# Altium PCB salinity.PcbDoc
Units mil, origin at the board's own origin, x right, y up, seen from the top; angles counter-clockwise.
Board outline 535 x 1270 mil, 4 copper layers (Top Layer, Internal Plane 1, Internal Plane 2, Bottom Layer), stack 30.634 mil thick; 20 components, 17 nets, 91 pads, 16 vias.
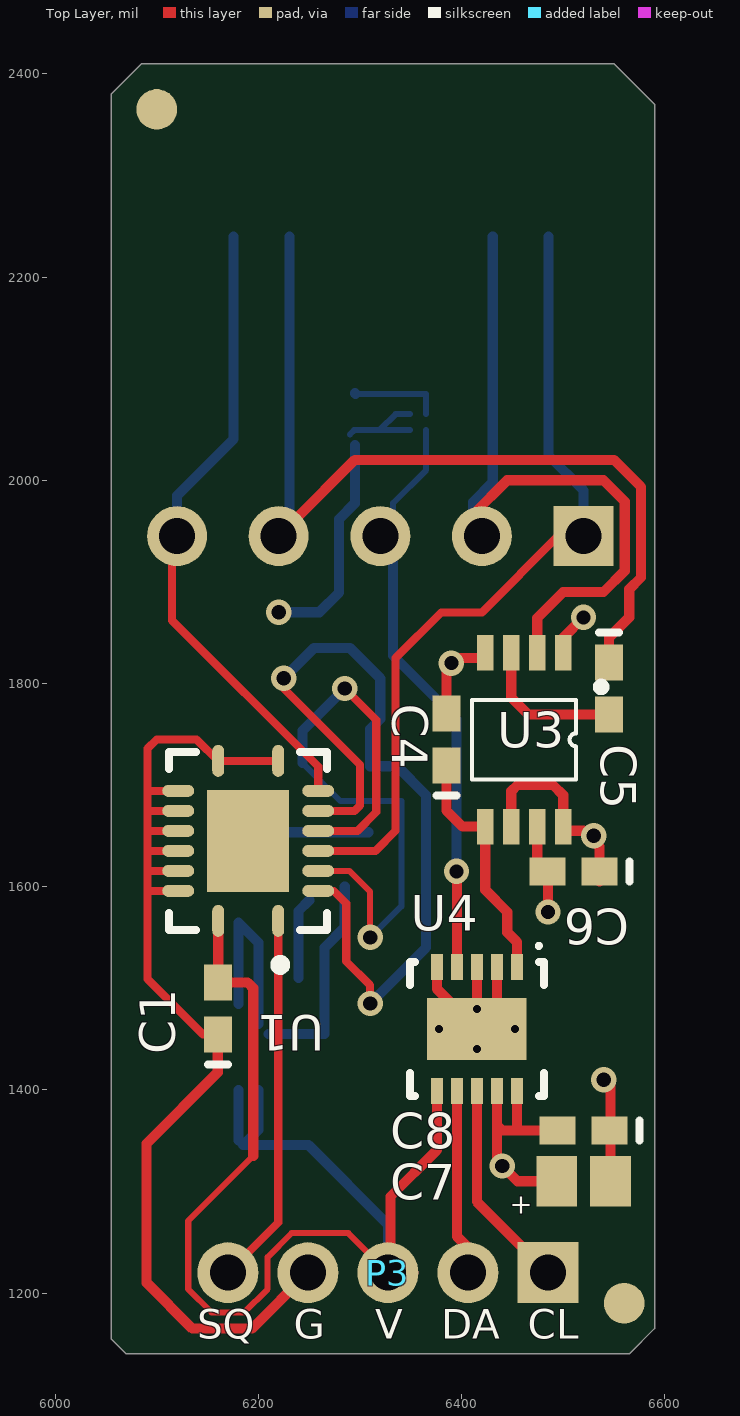
[diagram p0: Top Layer view]
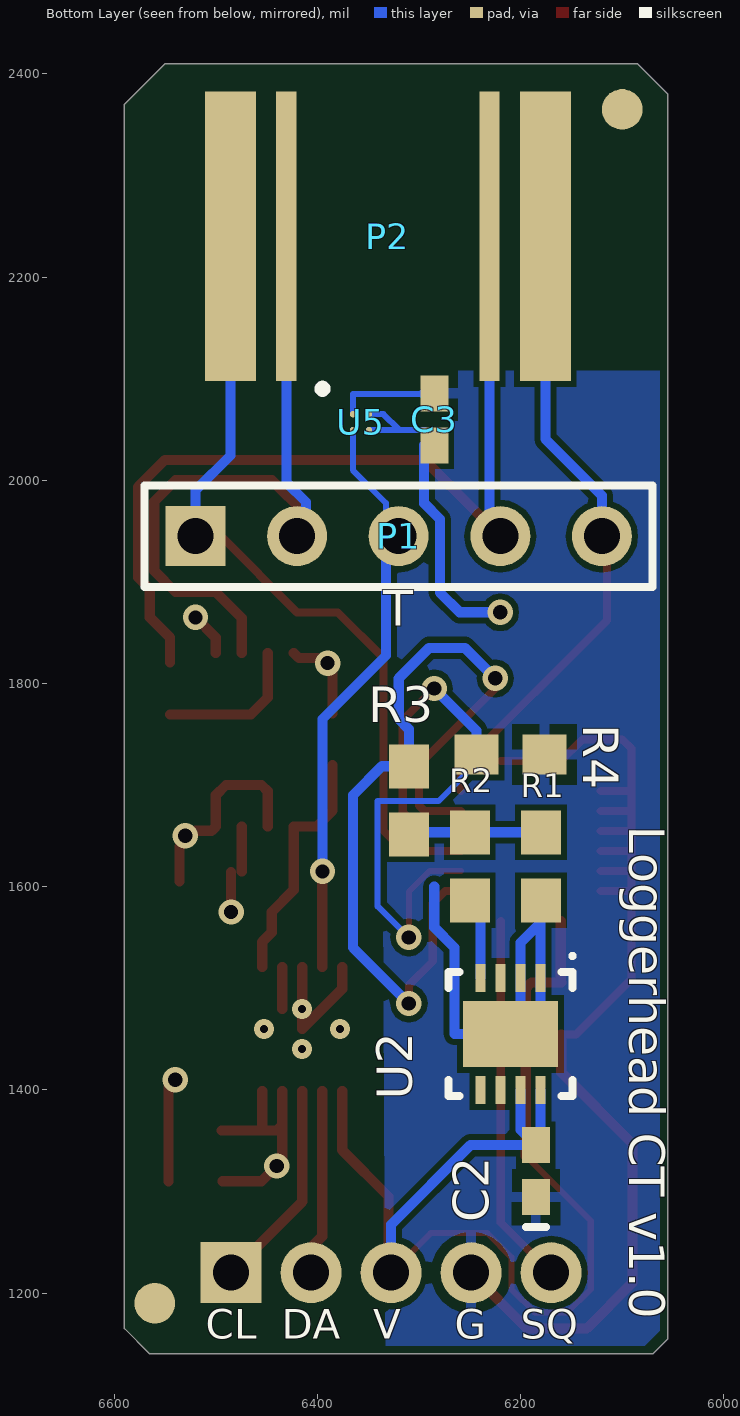
[diagram p1: Bottom Layer view, seen from below]
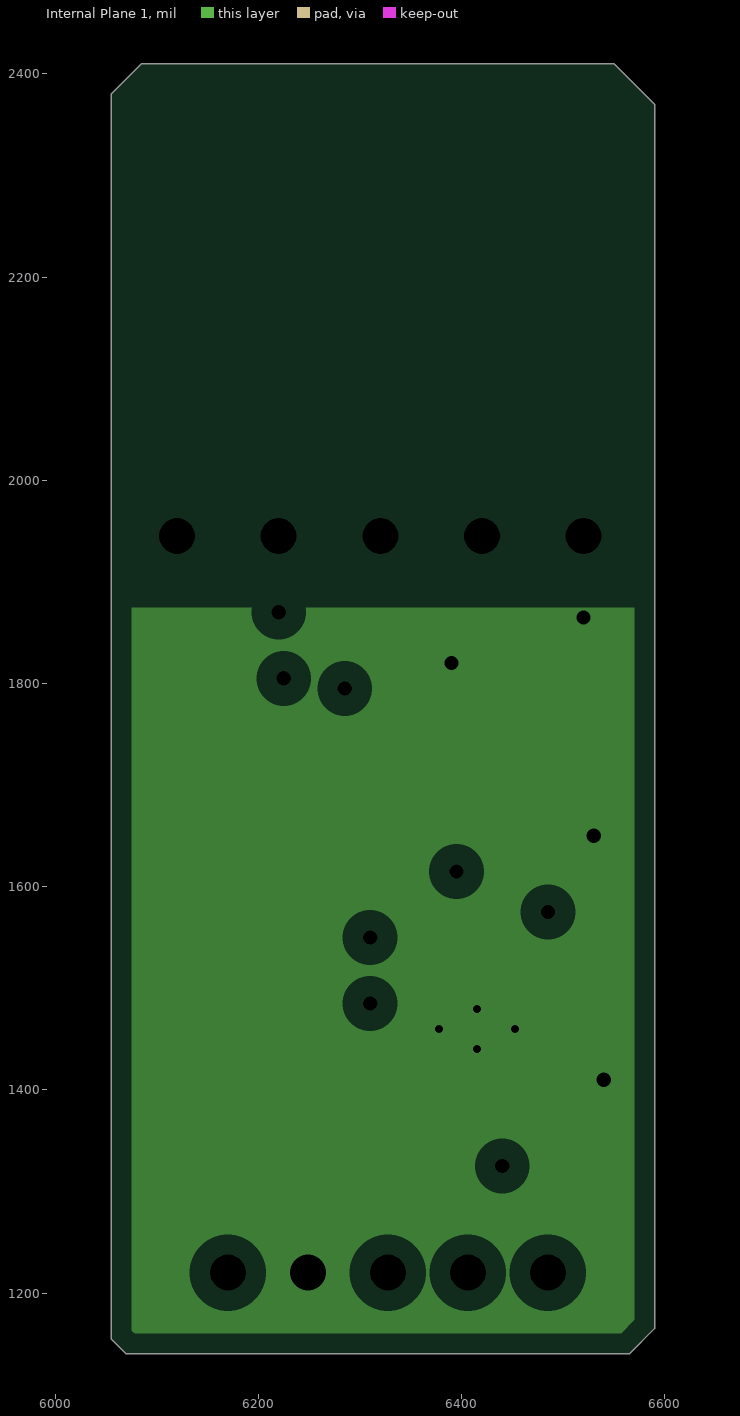
[diagram p2: Internal Plane 1, clearances drawn from the general rule]
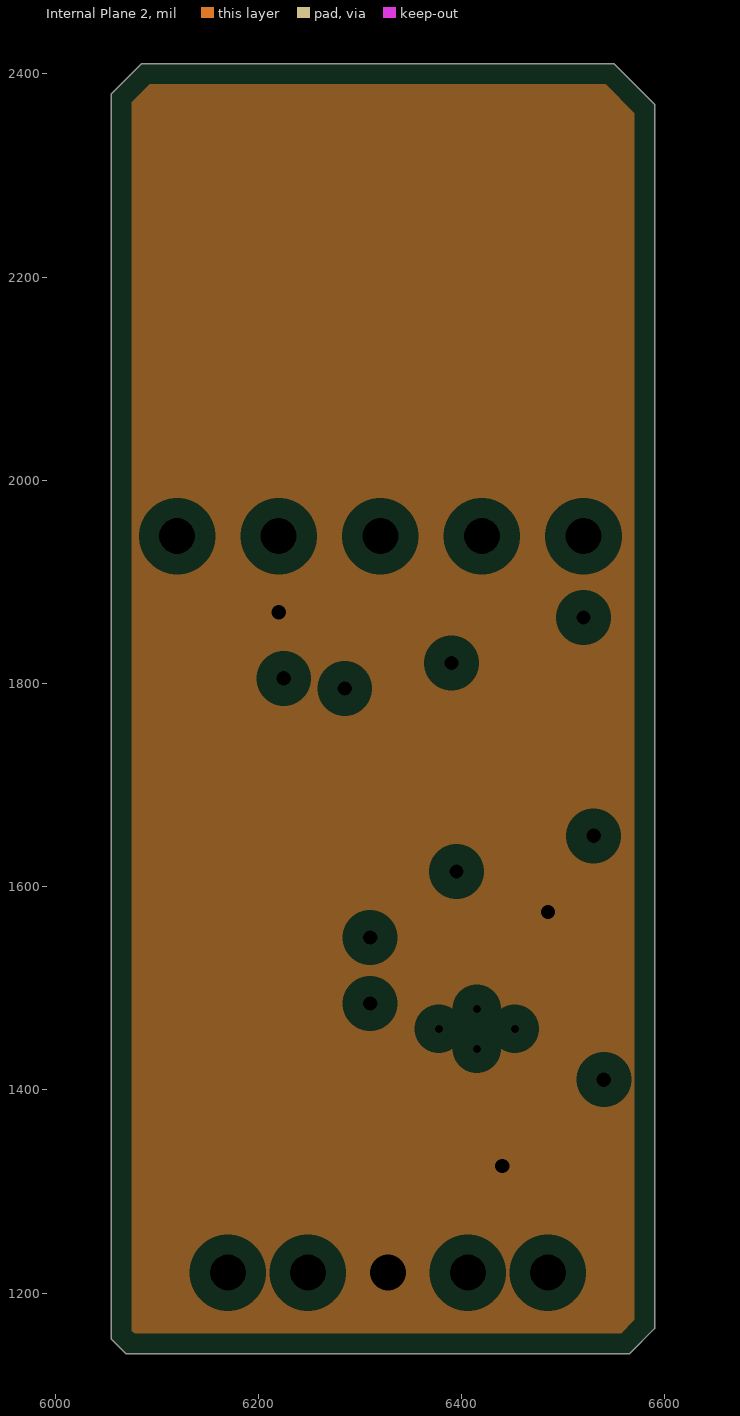
[diagram p3: Internal Plane 2, clearances drawn from the general rule]

## Layer stack, top to bottom
Top Solder: solder mask 0.4, Solder Resist, Dk 3.5
Top Layer: signal copper 1.4
Dielectric 1: core 10, FR-4, Dk 4.2
Internal Plane 1: plane copper 1.417, net GND
Dielectric 3: prepreg 5, Dk 4.2
Internal Plane 2: plane copper 1.417, net VCC
Dielectric 2: core 10, Dk 4.2
Bottom Layer: signal copper 1.4
Bottom Solder: solder mask 0.4, Solder Resist, Dk 3.5

## Board outline
6055,1155 6070,1140 6565,1140 6590,1165 6590,2370 6550,2410 6085,2410 6055,2380

## Design rules (kind name [scope] priority, off if disabled: settings)
Clearance [All] p1: gap=6
PlaneClearance [All] p1: clearance=20
PlaneConnect [All] p1: planeconnectstyle=Relief reliefexpansion=20 reliefentries=4 reliefconductorwidth=10 reliefairgap=10
PolygonConnect [All] p1: connectstyle=Relief reliefconductorwidth=10 reliefentries=4 polygonreliefangle="90 Angle" airgapwidth=10
RoutingVias [All] p1: holewidth=14 width=25 viastyle="Through Hole" minholewidth=10 minwidth=20 maxholewidth=28 maxwidth=50
SolderMaskExpansion [All] p1: expansion=4
Width [All] p1: maxlimit=50 minlimit=6 preferedwidth=8
27 further rules are at their usual default settings.

## Components (designator, comment, footprint, x,y, rotation, side; value= is the part's Value field where it differs from the comment)
C1 "0.1uF" 0402 6160,1480 r90 top
C2 "0.1uF" 0402 6185,1320 r90 bottom
C3 "0.1uF" 0402 6285,2060 r270 bottom
C4 "1.0uF" 0402 6385,1745 r90 top
C5 "0.1uF" 0402 6545,1795 r270 top
C6 "10nF" 0402 6510,1615 r180 top
C7 "10uF" Tant0805 6520,1310 r180 top
C8 "0.1uF" 0402 6520,1360 r180 top
P1 "Header 5" HDR1X5 6520,1945 r180 bottom
P2 "Salinity" SALINITY 6485.59,2240 r180 bottom
P3 "HDR_5x1_2mm" Hdr_5x1_2mm 6170,1220 r90 top
R1 "500x" 3-0603 6180,1620 r90 bottom
R2 "25k" 3-0603 6250,1620 r270 bottom
R3 "25X" 3-0603 6310,1685 r90 bottom
R4 "600X" 3-0603 6210,1730 r180 bottom
U1 "ts3a5018" ts3a5018_VQFN 6190,1645 r90 top
U2 "LT3092EDD#PBF" LT-DD-8_V 6210,1455 r270 bottom
U3 "LTC1966" MSOP8-LTC1966 6500,1830 r270 top
U4 "MCP3423-E/MF" DFN-MF10 6415,1460 r270 top
U5 "Temp" BGA4_TMP103 6365,2065 r180 bottom

## Footprints (in the part's own frame and the unit in brackets; to place one, negate y for a bottom-side part, rotate by r counter-clockwise, add the part's x,y. Pads: shape width x height; smd on the part's side, far side on the other; paste and mask are expansions set on the pad)
3-0603 [mm] "Chip Resistor; Body 1.6 x 0.9 mm (LxW typ)"
  rect 1.1x1 smd: 1(-0.85,0) 2(0.85,0)
0402 [mm] "Chip Capacitor; Body 1.0 x 0.5 mm (LxW typ)"
  rect 0.9x0.7 smd: 1(-0.65,0) 2(0.65,0)
  silkscreen extent -1.4,-0.25 -1.4,0.25
BGA4_TMP103 [mm] "BGA, 4-Leads, Body 0.8x0.8mm,  Pitch 0.40mm"
  round 0.16 smd: A1(0,0) A2(0.4,0) B1(0,-0.4) B2(0.4,-0.4)
  silkscreen extent -0.84,0.56 -0.69,0.71, body extent -0.18,-0.58 0.58,0.18, height 0.63
DFN-MF10 [mm] "SON, 10-Leads, Body 3x3mm, Pitch 0.5mm, Microchip Recommended"
  rect 0.65x0.3 smd: 1(-1.55,1) 2(-1.55,0.5) 3(-1.55,0) 4(-1.55,-0.5) 5(-1.55,-1) 6(1.55,-1) 7(1.55,-0.5) 8(1.55,0) 9(1.55,0.5) 10(1.55,1)
  rect 1.55x2.48 smd paste-0.635: 11(0,0)
  silkscreen extent -2.12,-1.68 1.67,1.68, body extent -1.52,-1.52 1.52,1.52, height 1
HDR1X5 [mm] "Connector; Header; 5 Position"
  rect 1.5x1.5 hole 0.9: 1(0,0)
  round 1.5 hole 0.9: 2(2.54,0) 3(5.08,0) 4(7.62,0) 5(10.16,0)
  silkscreen extent -1.27,-1.27 11.43,1.27
Hdr_5x1_2mm [mil]
  rect 60x60 hole 35.43: 1(0,-314.96)
  round 60 hole 35.43: 2(0,-236.22) 3(0,-157.48) 4(0,-78.74) 5(0,0)
LT-DD-8_V [mm] "SON, 8-Leads, Body 3x3mm, Pitch 0.5mm, Thermal Pad 1.65x2.38 mm, IPC Low Density"
  rect 0.7x0.25 smd mask+0.102: 1(-1.4,0.75) 2(-1.4,0.25) 3(-1.4,-0.25) 4(-1.4,-0.75) 5(1.4,-0.75) 6(1.4,-0.25) 7(1.4,0.25) 8(1.4,0.75)
  rect 1.65x2.38 smd paste-0.635 mask+0.102: 9(0,0)
  silkscreen extent -2,-1.55 1.55,1.6, body extent -1.5,-1.5 1.5,1.5, height 0.8
MSOP8-LTC1966 [mm]
  rect 0.889x0.42 smd: 1(0,0) 2(0,-0.65) 3(0,-1.3) 4(0,-1.95) 5(4.341,-1.95) 6(4.341,-1.3) 7(4.341,-0.65) 8(4.341,0)
  silkscreen extent 0.77,-2.28 3.16,1.03
SALINITY [mil]
  rect 50x285 smd paste+0 mask+0: 1(0,0) 4(310,0)
  rect 20x285 smd paste+0 mask+0: 2(55,0) 3(255,0)
Tant0805 [mil]
  rect 40x50 smd: 1(-26.5,0) 2(26.5,0)
ts3a5018_VQFN [mm] "quad SPDT analog switch"
  oval 0.8x0.3 smd: 1(-2,-0.75) 8(2,-0.75) 9(2,0.75) 16(-2,0.75)
  oval 0.3x0.8 smd: 2(-1.25,-1.75) 3(-0.75,-1.75) 4(-0.25,-1.75) 5(0.25,-1.75) 6(0.75,-1.75) 7(1.25,-1.75) 10(1.25,1.75) 11(0.75,1.75) 12(0.25,1.75) 13(-0.25,1.75) 14(-0.75,1.75) 15(-1.25,1.75)
  rect 2.55x2.05 smd paste-0.635: 17(0,0)
  silkscreen extent -3.22,-1.97 2.22,1.97, body extent -2.08,-1.83 2.07,1.83, height 1

## Part data
C1 C2 C3 C4 C5 C6 C8: library part C0402, "Ceramic Chip Capacitor - Standard"
C7: library part Tant0805
P1: "Header, 5-Pin"
P2: library part SALINITY
R1 R2 R3 R4: library part ERJ3BQ, "Low Ohmic Value Thick Film Chip Resistor, 0.22 Ohm to 9.1 Ohm Range, 1%, 2% and 5% Tolerance, 0603 Size, 0.2 W"
U1: "Quad SPDT"
U2: "200 mA Two-Terminal Programmable Current Source, 0.3 mA Isupply, 8-pin SON (DD-8), -40 to 125 degC, Pb-Free"
U4: "18-Bit, 4-Channel Analog-to-Digital Converter with I2C Interface and On-Board Reference, 10-pin DFN, Extended Temperature"
U5: library part LMT70

## Free pads (board coordinates)
  round 40 smd paste-20 mask+5: 0(6100,2365) 0(6560,1190)
  round 40 smd far side paste-20 mask+5: 0(6100,2365) 0(6560,1190)

## Via types
v1: diameter 25, hole 14, Top Layer to Bottom Layer, 12 vias
v2: diameter 19.68, hole 7.87, Top Layer to Bottom Layer, tented top, 4 vias

## Nets (pads, with @x,y where several pads share a name; then routed paths per layer and width w, separated by ;. In a path a pad name is that pad's centre, name@x,y a point inside that pad or via, vN(x,y) a via of type N, cw(c..) or ccw(c..) an arc to the next point about the centre after c; other vN are vias at no path point)
CURRENTSOURCE: R3.2 U1.2 U1.6 | length 845.5
  Top Layer w8: v1(6225,1805) 6225,1795 6300,1720 6300,1680 6294.53,1674.53 U1.6 ; U1.2 6274.21,1595.79 6286.5,1583.5 6286.5,1526.5 6310,1503 v1(6310,1485)
  Bottom Layer w10: v1(6225,1805) 6255,1835 6290,1835 6320,1805 6320,1765 6310,1755 R3.2 6336.54,1718.46 6365,1690 6365,1540 v1(6310,1485)
DRIVE1: P1.1 P2.1 U1.4 | length 798.3
  Top Layer w8: U1.4 6315.16,1635.16 6335,1655 6335,1825 6380,1870 6419.96,1870 6494.96,1945 P1.1
  Bottom Layer w10: P2.1 6485.59,2024.41 6520,1990 P1.1
DRIVE2: P1.5 P2.4 U1.7 | length 623.4
  Top Layer w8: P1.5@6115,1940 6115,1862.02 6258.9,1718.12 U1.7
  Bottom Layer w10: P1.5 6120,1985 6175.59,2040.59 P2.4
DRIVEGND: R4.1 U1.3 U1.5 | length 654.1
  Top Layer w6: U1.3 6289.53,1615.47 6310,1595 v1(6310,1550)
  Top Layer w8: U1.5 6297.47,1654.84 6316,1673.37 6316,1764 v1(6285,1795)
  Bottom Layer w6: R4.1@6243.46,1721.54 6280.81,1684.19 6340.69,1684.19 6340.69,1580.69 v1(6310,1550)
  Bottom Layer w10: R4.1@6243.46,1721.54 R4.1 6243.46,1753.46 v1(6285,1795)
GND: C1.1 C2.1 C3.1 C4.2 C6.1 C7.1 C8.1 P3.4 R4.2 U1.8 U1.9 U1.10 U1.11 U1.12 U1.13 U1.14 U1.15 U3.1 U3.4 U3.6 U3.8 U4.2 U4.3 U4.5 U4.11 U5.A1 | length 1827.6
  Top Layer w8: U1.15 6090.79,1595.79 ; U1.14 6090.79,1615.47 ; U1.13 6090.79,1635.16 ; U1.12 6090.79,1654.84 ; U1.11 6090.79,1674.53 ; U1.10 6090.79,1694.21 ; C1.1 6145.59,1454.41 6090.79,1509.21 6090.79,1595.79 ; U1.8 U1.9 6139.21,1745 6100,1745 6090.79,1735.79 6090.79,1694.21 ; 6090.79,1595.79 6090.79,1615.47 ; 6090.79,1615.47 6090.79,1635.16 ; 6090.79,1635.16 6090.79,1654.84 ; 6090.79,1654.84 6090.79,1674.53 ; 6090.79,1674.53 6090.79,1694.21
  Top Layer w10: C1.1 6160,1417.21 6090,1347.21 6090,1210 6135,1165 6193.74,1165 P3.4 ; U4.5 6375.63,1499.37 U4.11 v2(6415,1479.68) U4.3 ; C4.2 6385,1825 6418.23,1825 U3.4 ; U4.11@6434.69,1479.68 U4.2 ; U3.6 6448.82,1693.82 6455,1700 6490,1700 6500,1690 U3.8 6504.09,1655 6520,1655 6535.59,1639.41 C6.1@6535.59,1605 ; U3.1 6500,1845 v1(6520,1865) ; v1(6540,1410) 6546.5,1403.5 C7.1
  Bottom Layer w6: C3.1@6295.59,2085 6365,2085 U5.A1
  Bottom Layer w10: C3.1@6295,2085.59 C3.1@6295.59,2085
  other v1: 6530,1650 6390,1820
  other v2: 6415,1440.32 6377.6,1460 6452.4,1460
NetC5_2: C5.2 U3.3 | length 146.9
  Top Layer w10: U3.3 6448.82,1786.18 6465.59,1769.41 C5.2
NetR1_1: R1.1 U2.1 U2.2 U2.9 | length 396.1
  Bottom Layer w10: U2.9@6180.47,1484.53 U2.1 6180.47,1564.53 6200.16,1544.84 U2.2 U2.9@6200.16,1464.84 ; U2.9 6265,1455 6265,1540 6285,1560 6285,1600
NetR1_2: R1.2 R2.1 R3.1 | length 128.1
  Bottom Layer w10: R1.2 R2.1 R3.1@6308.07,1653.46
NetR2_2: R2.2 U2.4 | length 80.8
  Bottom Layer w10: U2.4 6239.53,1576.06 R2.2
RMS: C4.1 U3.5 U4.1 | length 240.2
  Top Layer w10: C4.1 6385,1675 6400.91,1659.09 U3.5 6423.23,1596.77 6445,1575 6445,1555 6454.37,1545.63 U4.1
SCL: P3.1 U4.8 | length 208
  Top Layer w10: U4.8 6415,1289.96 P3.1
SDA: P3.2 U4.7 | length 183.5
  Top Layer w10: U4.7 6395.31,1255.91 6406.22,1245 P3.2
SENSE1: P1.2 P2.2 U3.2 | length 714.2
  Top Layer w10: P1.2@6411.22,1940 6411.22,1966.22 6445,2000 6539.61,2000 6560.53,1979.08 6560.53,1910.92 6539.61,1890 6500,1890 6474.41,1864.41 U3.2
  Bottom Layer w10: P1.2@6411.22,1940 6411.22,1978.51 6430.59,1997.88 P2.2
SENSE2: C5.1 P1.4 P2.3 | length 863.6
  Top Layer w10: P1.4@6234.37,1959.37 6295,2020 6550,2020 6576.53,1993.47 6576.53,1904.29 6565,1892.76 6565,1865 6545,1845 C5.1
  Bottom Layer w10: P1.4 6230.59,1955.59 P2.3
SQW: P3.5 U1.1 | length 366.8
  Top Layer w8: P3.5 6219.53,1269.53 U1.1
TEMP: P1.3 U4.4 U5.B1 | length 572.3
  Top Layer w10: U4.4 v1@6395.31,1619.69
  Bottom Layer w6: P1.3@6332.48,1940 6332.48,1977.48 6365,2010 U5.B1
  Bottom Layer w10: P1.3@6332.48,1940 6332.48,1827.52 6395,1765 v1(6395,1615)
VCC: C1.2 C2.2 C3.2 C6.2 C7.2 C8.2 P3.3 U1.16 U2.7 U2.8 U3.7 U4.6 U4.9 U4.10 U5.A2 U5.B2 | length 1869.6
  Top Layer w6: 6195,1335 6131,1271 6131,1203.85 6153.85,1181 6186.15,1181 6209,1203.85 6209,1235.41 6232.59,1259 6288.48,1259 P3.3
  Top Layer w10: C1.2 6189.41,1505.59 6195,1500 6195,1335 ; C1.2@6160.47,1506.06 U1.16 ; P3.3@6352.48,1220 6330,1242.48 6330,1295 6375.63,1340.63 U4.6 ; U4.9 6434.69,1365.32 ; U4.10 6454.37,1360.63 6455,1360 ; C6.2@6474.41,1615 U3.7 ; v1(6485,1575) C6.2@6485,1614.41 ; C7.2 6455,1310 6434.69,1330.32 6434.69,1365.32 ; C8.2 6455,1360 ; 6434.69,1365.32 6440,1360 6455,1360
  Bottom Layer w6: C3.2@6290,2045 6294.25,2049.25 6320,2049.25 ; U5.B2 6320,2049.25 ; U5.A2 6335,2065 6320,2050 6320,2049.25
  Bottom Layer w10: C2.2@6180.47,1350.12 U2.8 ; U2.7 6200.16,1360.75 C2.2 6249.41,1345.59 6327.48,1267.52 P3.3 ; v1(6220,1870) 6260,1870 6279.47,1889.47 6279.47,1961.79 6295,1977.31 C3.2@6295,2034.41
  other v1: 6440,1325
pads on no net: U1.17 U2.3 U2.5 U2.6

## Polygon pours and split planes (outlines as drawn)
GND on Bottom Layer "Bottom Layer-No Net" (solid, pour order 11): 6332.84,1147.99 6077.84,1147.99 6062.84,1162.99 6062.84,2107.99 6337.84,2107.99
GND on Internal Plane 1 (split plane): 6569.9,1173.32 6556.68,1160.1 6078.32,1160.1 6075.1,1163.32 6075.1,1875 6569.9,1875
VCC on Internal Plane 2 (split plane): 6569.9,2361.68 6569.9,1173.32 6556.68,1160.1 6078.32,1160.1 6075.1,1163.32 6075.1,2371.68 6093.32,2389.9 6541.68,2389.9

## Other copper
Internal Plane 1 (plane layer: these items are gaps in the copper):
  pour cut-out: 6030,2355 6085,2410 6550,2410 6584.9,2375.1 6584.9,1875.1 6585,1875 6030,1875

## Silkscreen, mask and mechanical layers (free items; w line width, h text height)
Top Overlay:
  text "SQ" at 6140,1145 h50
  text "G" at 6235,1145 h50
  text "V" at 6315,1145 h50
  text "DA" at 6380,1145 h50
  text "CL" at 6465,1145 h50
Bottom Overlay:
  text "T" at 6335,1845 h60
  text "Loggerhead CT v1.0" at 6105,1660 h60 r90
  text "SQ" at 6200,1145 h50
  text "G" at 6265,1145 h50
  text "V" at 6345,1145 h50
  text "DA" at 6435,1145 h50
  text "CL" at 6510,1145 h50
Mechanical 1:
  the board outline again, w10

## Text inside footprints (layer, text, board x,y; h text height)
C7: Top Overlay "+" at 6470,1295 h19.68 r180